# Allegro board senior design v5DRL.brd
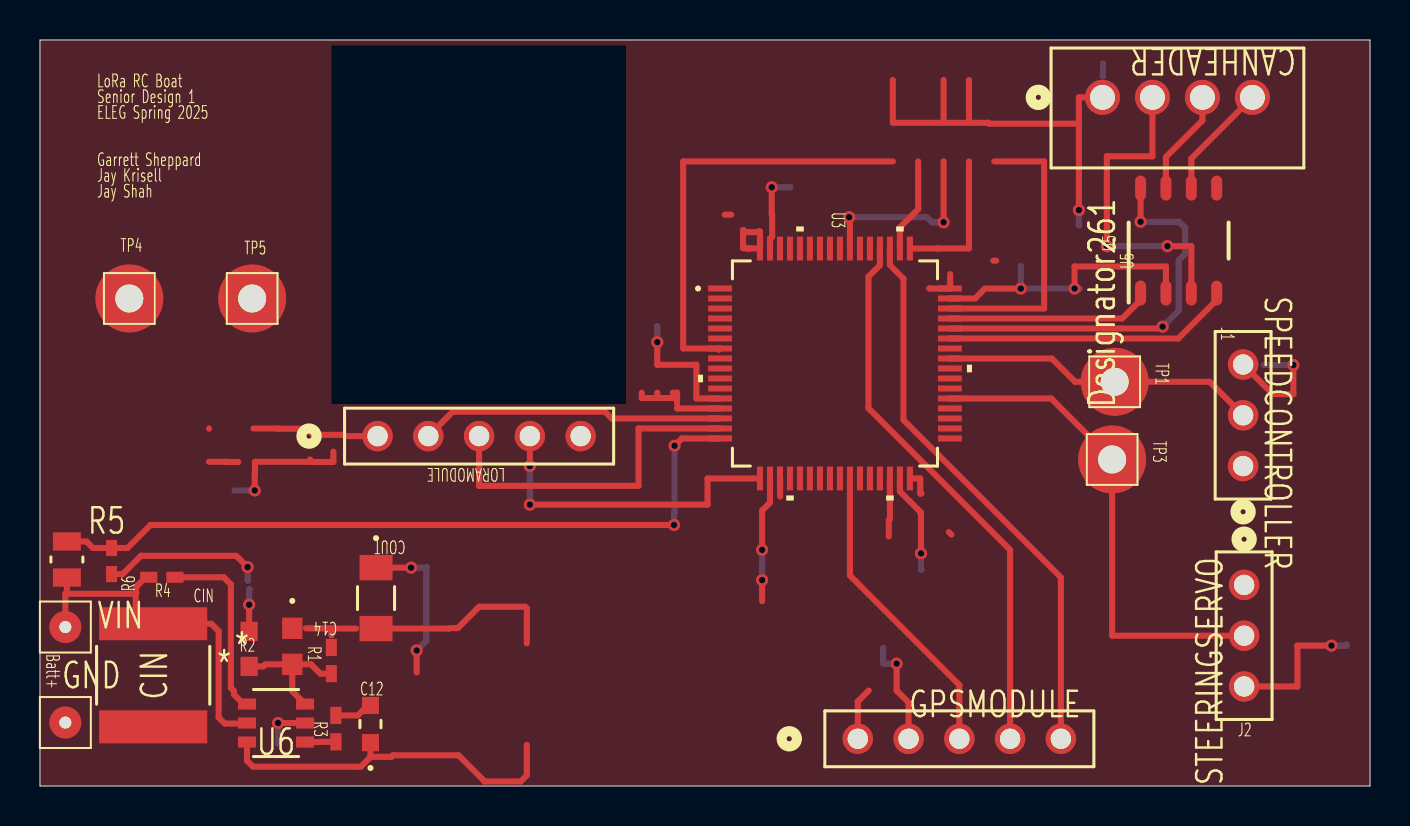
[diagram p0: board, top side]
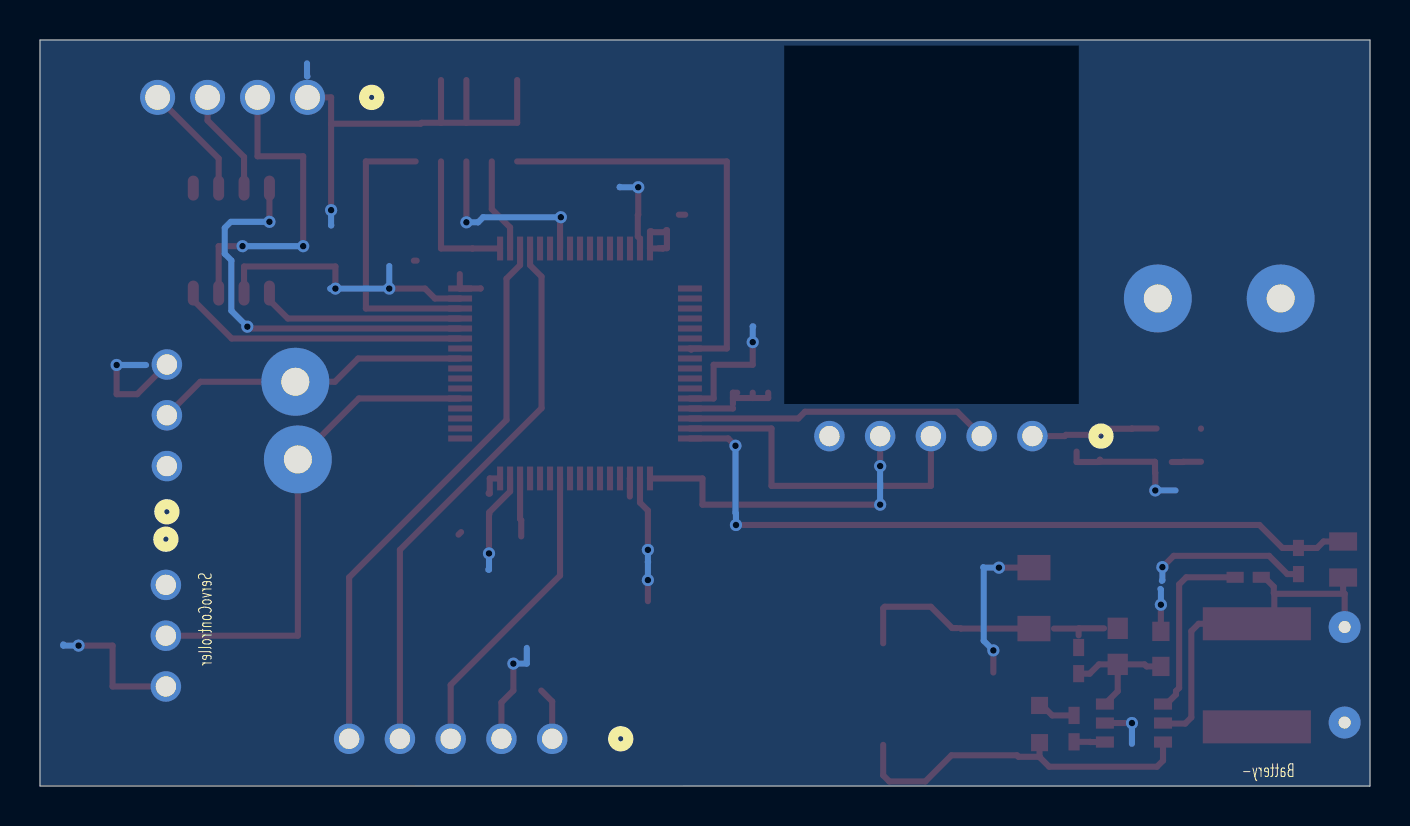
[diagram p1: board, bottom side, seen from below]

Outline 66.55 x 37.31 mm; copper layers: TOP, BOTTOM. Coordinates in mm from the lower left corner of the outline.
Outline path: 0,37.31 0,0 66.55,0 66.55,37.31 0,37.31

## Design rules (mm)
constraint set DEFAULT: min track width 0.305

## Placement (name value [footprint] x y rotation side)
C12  .1uf  [CAP_CL10_SAM-M]  16.54 3.1 90 top
C14  470pF  [CAP_0603G_AVX-M]  12.62 6.99 270 top
CANHEADER  CONN_B4B-XH-A  [CONN_B4B-XH-A_JST]  53.16 34.44 180 top
CIN  10uF  [CAP_NTS_55_2P8T_NIP]  5.66 5.54 90 top
COUT  10uf  [G-31_MUR-M]  16.81 9.4 270 top
GND  Battery-  [AMV_CON1]  1.27 3.18 0 top
GPSMODULE  CONN5_1LFBN-RC  [CONN5_1LFBN-RC_SUL]  40.92 2.36 0 top
LORAMODULE  CONN5_1LFBN-RC  [CONN5_1LFBN-RC_SUL]  16.89 17.5 0 top
R1  15K  [RC0402N_PAN-M]  14.58 6.27 270 top
R2  4.7K  [RC0603N_YAG-M]  10.46 6.86 90 top
R3  51  [RC0402N_YAG-M]  14.81 2.87 270 top
R4  5.1K  [RC0402N_PAN-M]  6.1 10.44 0 top
R5  30K  [RES_R0805_ROM-M]  1.35 11.33 90 top
R6  10K  [RES_1005_SAM-M]  3.58 11.25 90 top
SPEEDCONTROLLER  CONN_PPTC031  [CONN_PPTC031_SUL]  60.2 16 270 top
STEERINGSERVO  CONN_PPTC031  [CONN_PPTC031_SUL]  60.25 10.06 90 top
TP1  TEST POINT  [AMV_TEST_POINT]  53.77 20.22 0 top
TP3  TEST POINT  [AMV_TEST_POINT]  53.64 16.33 0 top
TP4  TEST POINT  [AMV_TEST_POINT]  4.47 24.38 0 top
TP5  TEST POINT  [AMV_TEST_POINT]  10.62 24.38 0 top
U3  STM32F4XXR2  [LQFP64-10X10MM]  39.78 21.13 0 top
U5  TCAN1042H-Q1D  [D0008A_L]  56.97 27.28 90 top
U6  R1240N001x  [SOT-23-6W_PE-SOT23-6W-0512_NMD]  11.81 3.15 0 top
VIN  Battery+  [AMV_CON1]  1.27 7.95 0 top

## Library data of the parts
C12 C14 COUT = C: User Part Number: PN; Tolerance: TOL
CANHEADER = B4B-XH-A: User Part Number: PN; Tolerance: TOL
CIN = KTS500B106M55N0T00: User Part Number: PN; Tolerance: TOL
GND VIN = CON1
GPSMODULE LORAMODULE = PPTC051LFBN-RC: User Part Number: PN; Tolerance: TOL
R1-R6 = R: User Part Number: PN; Tolerance: TOL
SPEEDCONTROLLER STEERINGSERVO = PPTC031LFBN-RC: User Part Number: PN; Tolerance: TOL
TP1 TP3-TP5 = TEST POINT
U3 = STM32F446RET6TR: User Part Number: PN; Tolerance: TOL
U5 = TCAN1042HDRQ1: Tolerance: TOL; User Part Number: PN
U6 = R1240N001B-TR-FE_3: User Part Number: PN; Tolerance: TOL

## Footprints (pads in the part's own frame, mm; a bottom-side part is the same pattern mirrored in y, then rotated)
AMV_CON1
  round 1.6 hole 0.6: 1(0,0)
AMV_TEST_POINT
  round 3.4 hole 1.4: 1(0,0)
CAP_0603G_AVX-M
  rect 1.067x1.016 smd: 1(-0.902,0) 2(0.902,0)
CAP_CL10_SAM-M
  rect 0.859x0.851 smd: 1(-0.929,0) 2(0.929,0)
CAP_NTS_55_2P8T_NIP
  rect 1.651x5.41 smd: 1(-2.578,0) 2(2.578,0)
CONN5_1LFBN-RC_SUL
  round 1.524 hole 1.016: 1(0,0) 2(2.54,0) 3(5.08,0) 4(7.62,0) 5(10.16,0)
CONN_B4B-XH-A_JST
  round 1.753 hole 1.245: 1(0,0) 2(-2.5,0) 3(-5,0) 4(-7.5,0)
CONN_PPTC031_SUL
  round 1.524 hole 1.016: 1(0,0) 2(-2.54,0) 3(-5.08,0)
D0008A_L
  oval 1.25x0.55 smd: 1(-2.625,1.905) 2(-2.625,0.635) 3(-2.625,-0.635) 4(-2.625,-1.905) 5(2.625,-1.905) 6(2.625,-0.635) 7(2.625,0.635) 8(2.625,1.905)
G-31_MUR-M
  rect 1.27x1.651 smd: 1(-1.524,0) 2(1.524,0)
LQFP64-10X10MM
  rect 1.194x0.305 smd: 1(-5.75,3.75) 2(-5.75,3.25) 3(-5.75,2.75) 4(-5.75,2.25) 5(-5.75,1.75) 6(-5.75,1.25) 7(-5.75,0.75) 8(-5.75,0.25) 9(-5.75,-0.25) 10(-5.75,-0.75) 11(-5.75,-1.25) 12(-5.75,-1.75) 13(-5.75,-2.25) 14(-5.75,-2.75) 15(-5.75,-3.25) 16(-5.75,-3.75) 33(5.75,-3.75) 34(5.75,-3.25) 35(5.75,-2.75) 36(5.75,-2.25) 37(5.75,-1.75) 38(5.75,-1.25) 39(5.75,-0.75) 40(5.75,-0.25) 41(5.75,0.25) 42(5.75,0.75) 43(5.75,1.25) 44(5.75,1.75) 45(5.75,2.25) 46(5.75,2.75) 47(5.75,3.25) 48(5.75,3.75)
  rect 0.305x1.194 smd: 17(-3.75,-5.75) 18(-3.25,-5.75) 19(-2.75,-5.75) 20(-2.25,-5.75) 21(-1.75,-5.75) 22(-1.25,-5.75) 23(-0.75,-5.75) 24(-0.25,-5.75) 25(0.25,-5.75) 26(0.75,-5.75) 27(1.25,-5.75) 28(1.75,-5.75) 29(2.25,-5.75) 30(2.75,-5.75) 31(3.25,-5.75) 32(3.75,-5.75) 49(3.75,5.75) 50(3.25,5.75) 51(2.75,5.75) 52(2.25,5.75) 53(1.75,5.75) 54(1.25,5.75) 55(0.75,5.75) 56(0.25,5.75) 57(-0.25,5.75) 58(-0.75,5.75) 59(-1.25,5.75) 60(-1.75,5.75) 61(-2.25,5.75) 62(-2.75,5.75) 63(-3.25,5.75) 64(-3.75,5.75)
RC0402N_PAN-M
  rect 0.859x0.551 smd: 1(-0.654,0) 2(0.654,0)
RC0402N_YAG-M
  rect 0.864x0.559 smd: 1(-0.66,0) 2(0.66,0)
RC0603N_YAG-M
  rect 0.965x0.864 smd: 1(-0.876,0) 2(0.876,0)
RES_1005_SAM-M
  rect 0.809x0.551 smd: 1(-0.654,0) 2(0.654,0)
RES_R0805_ROM-M
  rect 0.914x1.397 smd: 1(-0.902,0) 2(0.902,0)
SOT-23-6W_PE-SOT23-6W-0512_NMD
  rect 0.902x0.559 smd: 1(-1.454,0.95) 2(-1.454,0) 3(-1.454,-0.95) 4(1.454,-0.95) 5(1.454,0) 6(1.454,0.95)

## Nets
3.3V: C14.1 COUT.2 GPSMODULE.1 R1.1 SPEEDCONTROLLER.1 STEERINGSERVO.1 TP4.1 U3.13 U3.19 U3.32 U3.48 U3.64
GND: CIN.1
VBAT: U3.1
0: CANHEADER.1 COUT.1 GND.1 GPSMODULE.2 LORAMODULE.5 R2.2 R6.1 SPEEDCONTROLLER.3 STEERINGSERVO.3 TP5.1 U3.12 U3.18 U3.31 U3.47 U3.63 U5.2 U6.5
ADC: R5.2 R6.2 U3.16
PA13 TMS: U3.46
PA14 TCLK: U3.49
PA15 TDI: U3.50
PB3 TBO: U3.55
RESET: U3.7
N04277: GPSMODULE.3 U3.26
N04281: GPSMODULE.4 U3.52
N04285: GPSMODULE.5 U3.51
N04355: SPEEDCONTROLLER.2 TP1.1 U3.41
N04395: STEERINGSERVO.2 TP3.1 U3.37
N04429: LORAMODULE.1
N04477: LORAMODULE.2 U3.14
N04485: LORAMODULE.3 U3.15
N04755: U3.44 U5.8
N04759: U3.43 U5.4
N04763: U3.45 U5.1
N04855: CANHEADER.4 U5.6
N17576: C14.2 R1.2 R2.1 U6.6
N17942: R3.2 U6.4
N18028: C12.1 U6.3
N24517: LORAMODULE.4 U3.17
N24691: CANHEADER.3 U5.7
N24886: CANHEADER.2 U5.3(VCC)
N27791: U3.30
N061071: C12.2 R3.1
N088060: CIN.2 R4.1 R5.1 U6.2(VIN) VIN.1
N148600: R4.2 U6.1

Pads without a net: U3 2 3 4 5 6 8 9 10 11 20 21 22 23 24 25 27 28 29 33 34 35 36 38 39 40 42 53 54 56 57 58 59 60 61 62; U5 5

## Via types
v1: diameter 0.61, hole 0.33, TOP to BOTTOM, 27 vias

## Routing (per net, layer and track width the routed paths; a pad name or vN(x,y) marks a point on that pad's centre or on a via; arc(x,y) is an arc through that point)
3.3V: length 30.2
  TOP w0.305: 34.58,28.57 34.26,28.57 ; COUT.2 20.47,7.87 20.5,7.9 ; 44.09,14.66 44.09,14.63 44.04,14.63 44.04,15.38 U3.32 ; 30.11,19.67 30.11,19.41 30.89,19.41 ; U3.19 37.03,15.38 37.03,14.48 ; 35.22,27.7 35.95,27.7 35.95,27.74 36.03,27.74 U3.64 35.38,26.88 35.38,26.9 ; GPSMODULE.1 40.92,4.23 41.47,4.78 ; 8.46,17.88 8.46,17.87 ; 14.58,7.85 14.54,7.89 13.31,7.89 ; 14.58,7.85 14.6,7.87 15.81,7.87 ; 14.58,7.85 14.58,7.54 ; 9.92,16.21 9.35,16.21 9.33,16.22 8.46,16.22 ; 31.88,19.41 30.89,19.41 ; 31.88,19.41 31.88,19.1 ; 31.88,19.41 31.88,19.67 31.66,19.67 ; 30.89,19.41 30.89,19.67 ; 44.5,24.89 44.5,24.88 U3.48 45.54,24.88 45.54,25.6 ; 35.38,26.9 35.18,26.9 35.18,27.8 35.22,27.8 ; 35.38,26.9 35.59,26.9 ; U3.13 31.88,18.88 31.88,18.9 ; 24.36,7.14 24.36,8.89 24.28,8.97 21.97,8.97 20.9,7.9 20.65,7.9 ; 47.7,26.28 47.84,26.28 ; 45.61,12.57 45.48,12.7
0: length 107.5
  TOP w0.305: 46.48,33.17 47.45,33.17 47.5,33.13 51.98,33.13 ; 46.48,33.17 45.21,33.17 ; 46.48,33.17 46.48,35.31 ; v1(44.08,11.63) 44.08,13.58 44.07,13.59 44.07,13.69 43.03,14.73 U3.31 ; 45.21,35.31 45.21,33.17 ; 45.21,33.17 42.67,33.17 42.67,35.31 ; U6.5 v1(11.91,3.15) ; 51.98,33.13 51.98,34.44 CANHEADER.1 ; 51.98,33.13 v1(51.98,28.8) ; 18.85,5.68 v1(18.85,6.78) ; v1(62.71,21.06) 62.71,19.6 61.68,19.6 SPEEDCONTROLLER.3 ; v1(36.13,11.81) 36.13,13.78 36.53,14.17 U3.18 ; GPSMODULE.2 43.46,4.18 42.86,4.78 v1(42.86,6.12) ; U3.12 32.84,19.38 32.84,21.07 30.89,21.07 v1(30.89,22.2) ; 14.68,16.73 14.68,16.21 13.63,16.21 13.51,16.32 13.51,16.22 10.77,16.22 10.76,16.21 10.76,15.67 10.74,15.67 v1(10.74,14.78) ; R2.2 v1(10.46,9.07) ; v1(64.62,7.02) 62.92,7.02 62.92,4.98 STEERINGSERVO.3 ; v1(36.61,29.95) 36.61,28.57 36.64,28.55 36.64,27.48 36.53,27.37 U3.63 ; U5.2 56.34,25.98 51.77,25.98 v1(51.77,24.88) ; 36.13,9.25 v1(36.13,10.3) ; COUT.1 v1(18.57,10.92) ; v1(10.39,10.95) 9.82,11.51 5.05,11.51 4.14,10.6 R6.1 ; v1(49.07,24.88) 47.28,24.88 46.79,24.38 U3.47
  BOTTOM w0.305: v1(10.39,10.95) 10.39,10.29 10.41,10.26 ; 19.33,10.92 19.33,7.26 v1(18.85,6.78) ; 19.33,10.92 19.35,10.95 ; 19.33,10.92 v1(18.57,10.92) ; v1(42.86,6.12) 42.19,6.12 42.19,6.91 ; v1(36.61,29.95) 37.54,29.95 37.54,29.97 ; 65.38,7.09 65.38,7.02 v1(64.62,7.02) ; v1(51.98,28.8) 51.98,28.04 51.97,28.04 ; v1(62.71,21.06) 61.24,21.06 ; v1(10.46,9.07) 10.46,9.83 10.49,9.86 ; 49.07,26.01 v1(49.07,24.88) v1(51.77,24.88) 52.02,24.88 52.02,24.87 ; 36.13,11.2 36.12,11.2 ; 36.13,11.2 v1(36.13,11.81) ; 36.13,11.2 v1(36.13,10.3) ; 53.16,35.5 53.19,35.5 53.19,36.14 ; v1(44.08,11.63) 44.08,10.82 44.12,10.82 ; 30.86,22.99 30.89,22.99 v1(30.89,22.2) ; v1(11.91,3.15) 11.91,2.11 ; 9.73,14.78 v1(10.74,14.78)
ADC: length 37.4
  TOP w0.305: v1(31.72,13.06) 5.53,13.06 4.38,11.91 R6.2 2.65,11.91 2.32,12.23 R5.2 ; v1(31.75,17.02) 32.11,17.38 U3.16
  BOTTOM w0.305: v1(31.75,17.02) 31.75,13.67 31.72,13.64 v1(31.72,13.06)
PA13 TMS: length 14.6
  TOP w0.305: 47.75,31.24 50.24,31.24 50.24,23.88 U3.46
PA14 TCLK: length 7.3
  TOP w0.305: 46.48,31.24 46.48,26.89 44.91,26.89 44.91,26.88 U3.49
PA15 TDI: length 4.7
  TOP w0.305: 43.94,31.24 43.94,28.85 43.03,27.94 U3.50
PB3 TBO: length 9.5
  TOP w0.305: v1(40.49,28.45) 40.53,28.45 U3.55 ; v1(45.21,28.19) 45.21,31.24
  BOTTOM w0.305: v1(40.49,28.45) 44.37,28.45 44.63,28.19 v1(45.21,28.19)
RESET: length 21.8
  TOP w0.305: 33.96,21.82 U3.7 32.18,21.88 32.18,31.24 42.67,31.24
N04277: length 15.3
  TOP w0.305: U3.26 40.53,10.53 46,5.05 GPSMODULE.3
N04281: length 27.7
  TOP w0.305: U3.52 42.03,26.05 41.45,25.48 41.45,18.9 48.54,11.81 GPSMODULE.4
N04285: length 28.1
  TOP w0.305: GPSMODULE.5 51.08,10.43 43.21,18.31 43.21,25.37 42.53,26.05 U3.51
N04355: length 15.8
  TOP w0.305: SPEEDCONTROLLER.2 58.52,20.22 TP1.1 51.79,20.22 50.63,21.38 U3.41
N04395: length 24.8
  TOP w0.305: U3.37 50.59,19.38 TP3.1 53.64,7.52 STEERINGSERVO.2
N04429: length 6.5
  TOP w0.305: LORAMODULE.1 15.28,17.5 15.21,17.56 13.67,17.56 13.51,17.72 13.51,17.87 11.91,17.87 11.91,17.88 10.68,17.88
N04477: length 15.2
  TOP w0.305: LORAMODULE.2 20.65,18.72 28.27,18.72 28.61,18.38 U3.14
N04485: length 17.4
  TOP w0.305: U3.15 29.95,17.88 29.95,15.01 21.97,15.01 LORAMODULE.3
N04755: length 20.1
  TOP w0.305: v1(56.17,22.97) 56.08,22.88 U3.44 ; U5.8 v1(55.07,28.22)
  BOTTOM w0.305: v1(55.07,28.22) 57,28.22 57.3,27.91 57.3,26.62 56.97,26.29 56.97,23.77 v1(56.17,22.97)
N04759: length 14.5
  TOP w0.305: U5.4 58.88,24.3 56.96,22.38 U3.43
N04763: length 10.3
  TOP w0.305: U3.45 54.15,23.38 55.07,24.3 U5.1
N04855: length 5.8
  TOP w0.305: U5.6 57.61,31.39 CANHEADER.4
N17576: length 6.6
  TOP w0.305: C14.2 12.62,4.74 U6.6 ; C14.2 11.28,6.08 11.18,5.98 R2.1 ; C14.2 13.56,6.08 14.02,5.62 R1.2
N17942: length 1.5
  TOP w0.305: U6.4 14,2.2 14.01,2.21 R3.2
N18028: length 18.2
  TOP w0.305: C12.1 16.54,1.46 ; 16.54,1.46 16.51,1.44 16.51,1.42 16.05,0.97 10.66,0.97 10.36,1.27 U6.3 ; 16.54,1.46 17.59,1.46 17.67,1.54 20.94,1.54 22.25,0.23 24.05,0.23 24.36,0.53 24.36,2.06
N24517: length 16.3
  TOP w0.305: v1(24.51,14.07) 33.4,14.07 33.4,15.38 U3.17 ; LORAMODULE.4 v1(24.51,16)
  BOTTOM w0.305: v1(24.51,16) v1(24.51,14.07)
N24691: length 5.3
  TOP w0.305: U5.7 56.34,31.46 58.16,33.29 CANHEADER.3
N24886: length 16.3
  TOP w0.305: v1(53.38,27) 53.38,31.5 55.66,31.5 CANHEADER.2 ; v1(56.41,27) 57.61,27 U5.3
  BOTTOM w0.305: v1(53.38,27) v1(56.41,27)
N27791: length 2.9
  TOP w0.305: U3.30 42.53,13.35 42.47,13.3 42.47,12.48
N061071: length 1.9
  TOP w0.305: R3.1 15.9,3.53 16.4,4.03 C12.2
N088060: length 18.7
  TOP w0.305: 4.79,9.63 4.78,9.61 1.27,9.61 ; 4.79,9.63 4.79,8.42 5.09,8.12 CIN.2 8.57,8.12 8.94,7.75 8.94,3.43 9.25,3.12 10.33,3.12 U6.2 ; 4.79,9.63 4.81,9.65 4.81,9.97 5.29,10.44 R4.1 ; 1.27,9.61 1.35,9.69 R5.1 ; 1.27,9.61 VIN.1
N148600: length 9.4
  TOP w0.305: R4.2 9.19,10.44 9.55,10.08 9.55,4.91 9.71,4.75 9.71,4.58 10.19,4.1 U6.1

## Copper pours and planes (outline as drawn; the poured copper is in the pictures)
3.3V on TOP: 66.57,0 0,0 0,37.31 66.55,37.31 66.55,0.03 ; 1 cut-out
0 on BOTTOM: 0,37.31 66.55,37.31 66.55,0.04 0,-0.03 ; 1 cut-out

## Text on the board
Ref Des/Silkscreen Bottom: Battery- | ServoController
Ref Des/Silkscreen Top: LoRa RC Boat | Senior Design 1 | ELEG Spring 2025 | Garrett Sheppard | Jay Krisell | Jay Shah | CIN | J2 | Batt+ | J1
DEVICE_TYPE_TOP: Battery+
